# Altium PCB Pic-Kit.PcbDoc
Units mm, origin at the board's own origin, x right, y up, seen from the top; angles counter-clockwise.
Board outline 25.4 x 88.65 mm, 2 copper layers (Top Layer, Bottom Layer); 3 components, 5 nets, 58 pads, 0 vias.
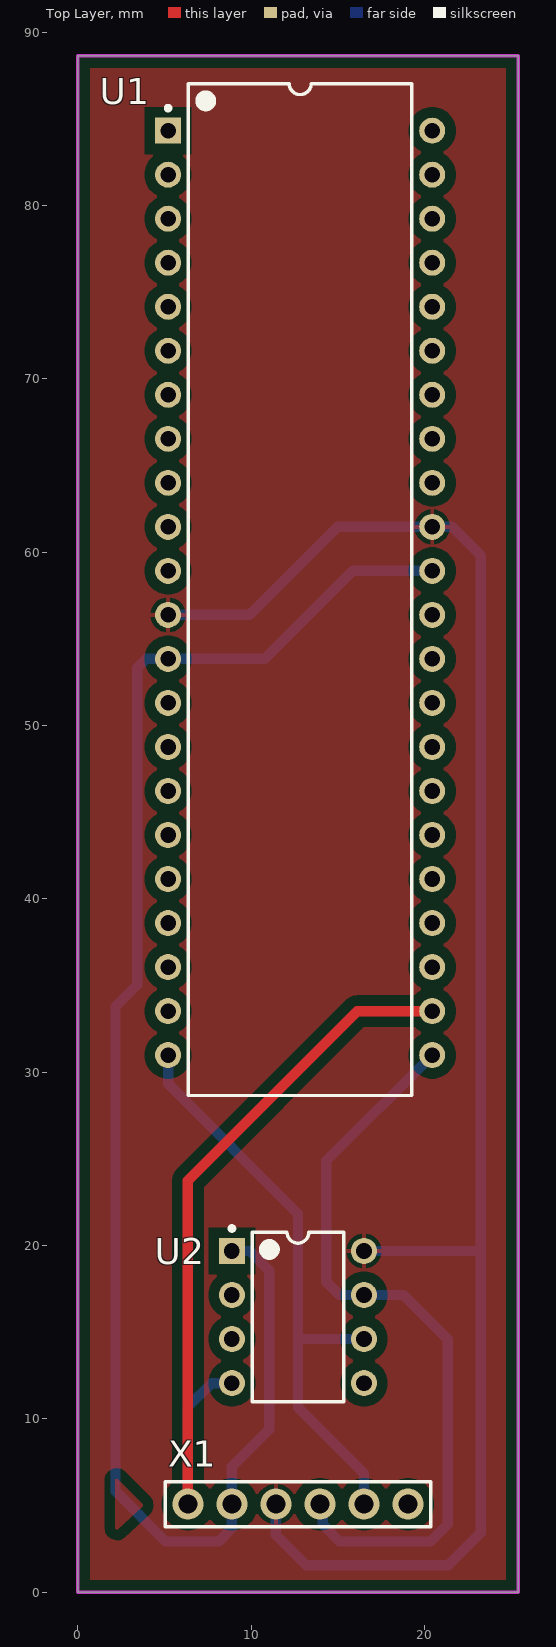
[diagram p0: Top Layer view]
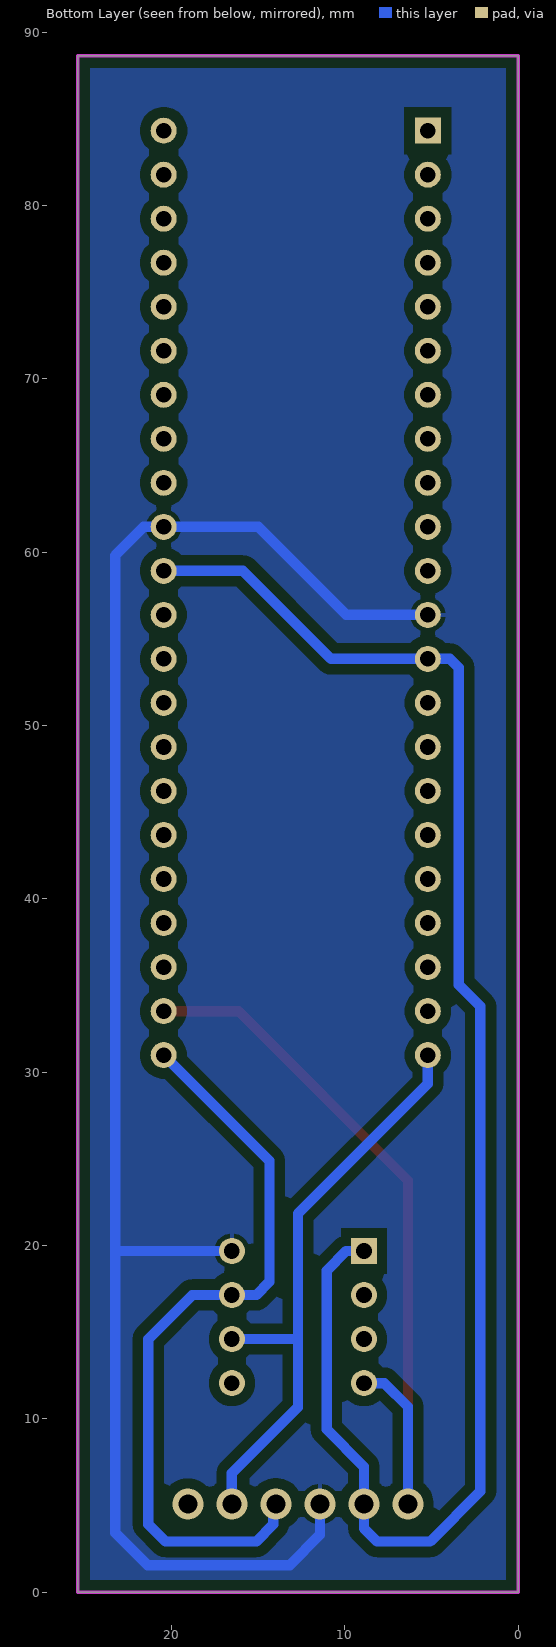
[diagram p1: Bottom Layer view, seen from below]

## Layer stack, top to bottom
Top Solder: solder mask 0.0102, Solder Resist, Dk 3.5
Top Layer: signal copper 0.0356
Dielectric 1: dielectric 0.32, FR-4, Dk 4.8
Bottom Layer: signal copper 0.0356
Bottom Solder: solder mask 0.0102, Solder Resist, Dk 3.5

## Board outline
0,0 0,88.646 25.4,88.646 25.4,0

## Design rules (kind name [scope] priority, off if disabled: settings)
Clearance [All] p1: gap=0.6 ignorepadtopadclearanceinfootprint=FALSE
PolygonConnect [All] p1: connectstyle=Relief reliefconductorwidth=0.254 reliefentries=4 polygonreliefangle="90 Angle" airgapwidth=0.254
RoutingVias [All] p1: holewidth=0.711 width=1.27 viastyle="Through Hole" minholewidth=0.711 minwidth=1.27 maxholewidth=0.711 maxwidth=1.27
SolderMaskExpansion [All] p1: expansion=0.102 istentingtop=FALSE
Width [All] p1: maxlimit=5 minlimit=0.254 preferedwidth=0.4
30 further rules are at their usual default settings.

## Components (designator, comment, footprint, x,y, rotation, side; value= is the part's Value field where it differs from the comment)
U1 "PIC18F4620-macet" PDIP600-P44 12.827,60.198 r0 top
U2 "PIC12F675-I/SN" PDIP300-P8 12.7,15.875 r0 top
X1 "" "CON: PAD 6" 12.7,5.08 r0 top

## Footprints (in the part's own frame and the unit in brackets; to place one, negate y for a bottom-side part, rotate by r counter-clockwise, add the part's x,y. Pads: shape width x height; smd on the part's side, far side on the other; paste and mask are expansions set on the pad)
"CON: PAD 6" [mm] "PAD-6"
  round 1.8 hole 1.1: 1(-6.35,0) 2(-3.81,0) 3(-1.27,0) 4(1.27,0) 5(3.81,0) 6(6.35,0)
  silkscreen extent -7.65,-1.3 7.65,1.3
PDIP300-P8 [mm] "8-Pin Plastic Dual In-Line Package (PDIP)"
  rect 1.5x1.5 hole 0.9: 1(-3.81,3.81)
  round 1.5 hole 0.9: 2(-3.81,1.27) 3(-3.81,-1.27) 4(-3.81,-3.81) 5(3.81,-3.81) 6(3.81,-1.27) 7(3.81,1.27) 8(3.81,3.81)
  silkscreen extent -3.93,-4.9 2.65,5.23, body extent -3.55,-4.9 3.55,4.9, height 4.32
PDIP600-P44 [mm] "DIP, 44-Pin, Row Spacing 15.24 mm, Pitch 2.54 mm"
  rect 1.5x1.5 hole 0.9: 1(-7.62,24.13)
  round 1.5 hole 0.9: 2(-7.62,21.59) 3(-7.62,19.05) 4(-7.62,16.51) 5(-7.62,13.97) 6(-7.62,11.43) 7(-7.62,8.89) 8(-7.62,6.35) 9(-7.62,3.81) 10(-7.62,1.27) 11(-7.62,-1.27) 12(-7.62,-3.81) 13(-7.62,-6.35) 14(-7.62,-8.89) 15(-7.62,-11.43) 16(-7.62,-13.97) 17(-7.62,-16.51) 18(-7.62,-19.05) 19(-7.62,-21.59) 20(-7.62,-24.13) 21(-7.62,-26.67) 22(-7.62,-29.21) 23(7.62,-29.21) 24(7.62,-26.67) 25(7.62,-24.13) 26(7.62,-21.59) 27(7.62,-19.05) 28(7.62,-16.51) 29(7.62,-13.97) 30(7.62,-11.43) 31(7.62,-8.89) 32(7.62,-6.35) 33(7.62,-3.81) 34(7.62,-1.27) 35(7.62,1.27) 36(7.62,3.81) 37(7.62,6.35) 38(7.62,8.89) 39(7.62,11.43) 40(7.62,13.97) 41(7.62,16.51) 42(7.62,19.05) 43(7.62,21.59) 44(7.62,24.13)
  silkscreen extent -7.74,-31.54 6.45,26.85, body extent -7.3,-26.85 7.3,26.85, height 6.35

## Part data
U1: "44-Pin PDIP", DatasheetVersion="revE, May-2008", PackageDescription="40-Lead Plastic Dual In-Line (P) - 600 mil Body [PDIP]", PackageReference=PDIP600-P40, PackageVersion="revBB, Aug-2009"
U2: "FLASH-Based 8-Bit CMOS Microcontroller, 10-Bit A/D, 8-Pin SOIC 150mil, Industrial Temperature", Code_IPC=SOIC127P600-8, Code_JEDEC=MS-012, DatasheetVersion="revF, Sep-2009", Note1="Refer to data sheet (DS41190F) for details of supply voltage range under different conditions.", PackageDescription="8-Lead Plastic Small Outline (SN) - Narrow, 3.90mm Body [SOIC]", PackageReference=SOIC-SN8, PackageVersion="revBB, Aug-2009"
X1: library part 6-Connector

## Nets (pads, with @x,y where several pads share a name; then routed paths per layer and width w, separated by ;. In a path a pad name is that pad's centre, name@x,y a point inside that pad or via, vN(x,y) a via of type N, cw(c..) or ccw(c..) an arc to the next point about the centre after c; other vN are vias at no path point)
ICSCLK: U1.22 U2.6 X1.5 | length 34.4
  Bottom Layer w0.6: U1.22 5.207,29.337 12.7,21.844 12.7,14.605 ; X1.5 16.51,6.858 12.7,10.668 12.7,14.605 ; U2.6 12.7,14.605
ICSDAT: U1.23 U2.7 X1.4 | length 44.2
  Bottom Layer w0.6: X1.4 14.123,4.927 14.123,3.911 15.113,2.921 20.34,2.921 21.336,3.917 21.336,14.605 18.796,17.145 U2.7 15.113,17.145 14.343,17.915 14.343,24.884 U1.23 U1.23@20.447,30.69
M\C\L\R\: U1.24 U2.4 X1.1 | length 45.5
  Top Layer w0.6: X1.1 6.35,23.749 16.129,33.528 U1.24
  Bottom Layer w0.6: X1.1 6.35,10.697 7.718,12.065 U2.4
VDD: U1.13 U1.34 U2.1 X1.2 | length 94
  Bottom Layer w0.6: U2.1 9.906,19.685 11.049,18.542 11.049,9.398 8.89,7.239 X1.2 8.89,3.683 8.128,2.921 5.08,2.921 2.175,5.826 2.175,33.798 3.429,35.052 3.429,53.34 3.937,53.848 U1.13 10.795,53.848 15.875,58.928 U1.34
VSS: U1.12 U1.35 U2.8 X1.3 | length 99.1
  Bottom Layer w0.6: U1.12 9.906,56.388 14.986,61.468 U1.35 21.59,61.468 23.241,59.817 23.241,19.558 ; X1.3 11.43,3.302 13.169,1.563 21.375,1.563 23.241,3.429 23.241,19.558 ; U2.8 23.114,19.685 23.241,19.558
pads on no net: U1.1 U1.2 U1.3 U1.4 U1.5 U1.6 U1.7 U1.8 U1.9 U1.10 U1.11 U1.14 U1.15 U1.16 U1.17 U1.18 U1.19 U1.20 U1.21 U1.25 U1.26 U1.27 U1.28 U1.29 U1.30 U1.31 U1.32 U1.33 U1.36 U1.37 U1.38 U1.39 U1.40 U1.41 U1.42 U1.43 U1.44 U2.2 U2.3 U2.5 X1.6

## Polygon pours and split planes (outlines as drawn)
VSS on Top Layer "VSS_L01_P001" (solid, pour order 1): 0,0 0,88.646 25.4,88.646 25.4,0
no net on Top Layer "NONET_L01_P000" (solid, pour order 0): 2.159,3.492 2.159,6.667 3.81,5.016
VSS on Bottom Layer "VSS_L02_P002" (solid, pour order 2): 0,0 0,88.646 25.4,88.646 25.4,0

## Keep-outs
Keep-Out Layer:
  the board outline again, w0.2